# Altium PCB MODULIQ_ADC_10Vpp.PcbDoc (part 1 of 2)
Units mm, origin at the board's own origin, x right, y up, seen from the top; angles counter-clockwise.
Board outline 24 x 76.5 mm, 4 copper layers (L1, P2, L3, L4), stack 1.512 mm thick; 81 components, 92 nets, 302 pads, 168 vias.
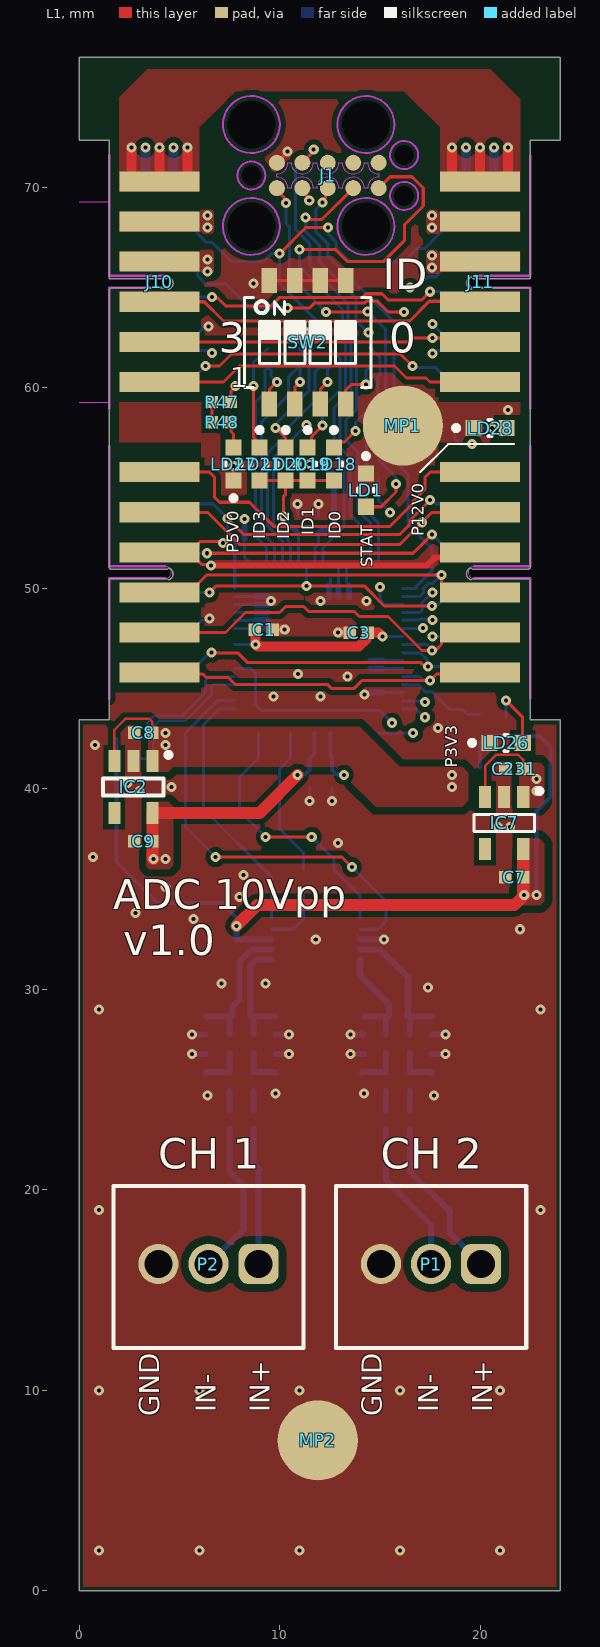
[diagram p0: L1 view]
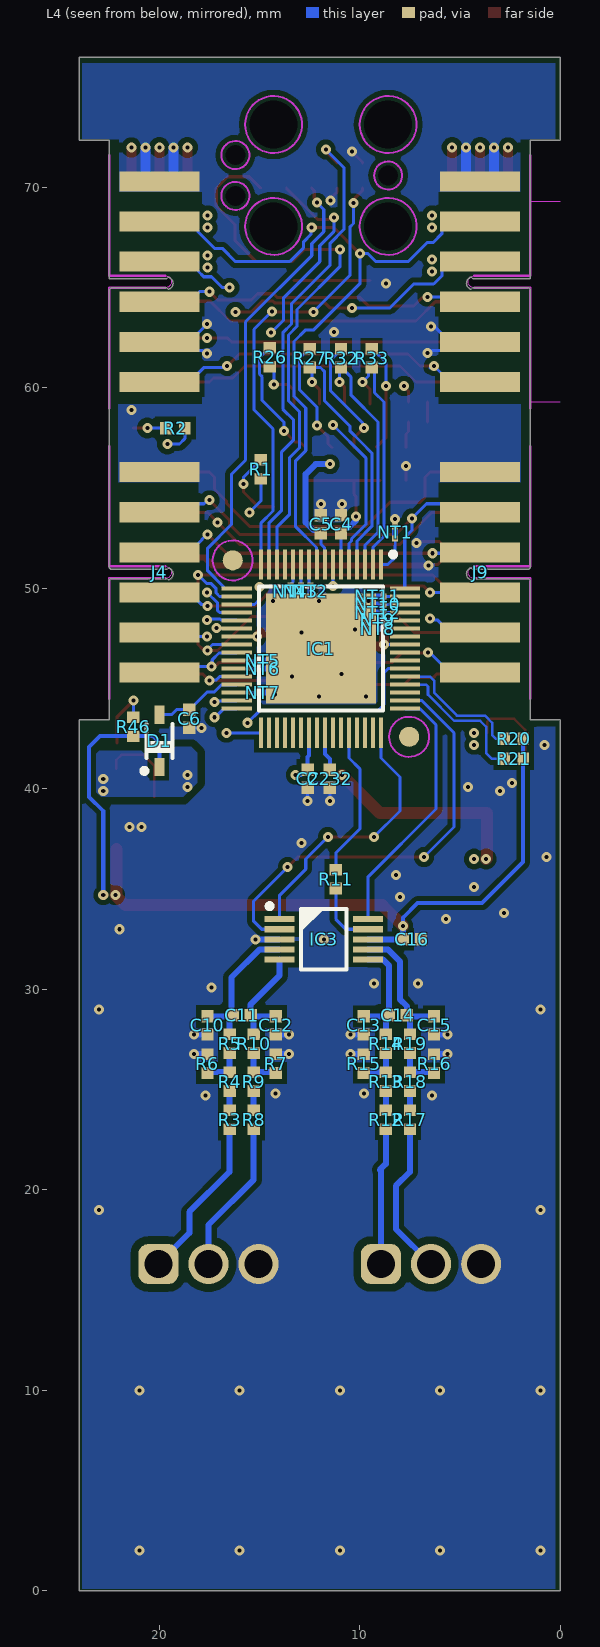
[diagram p1: L4 view, seen from below]
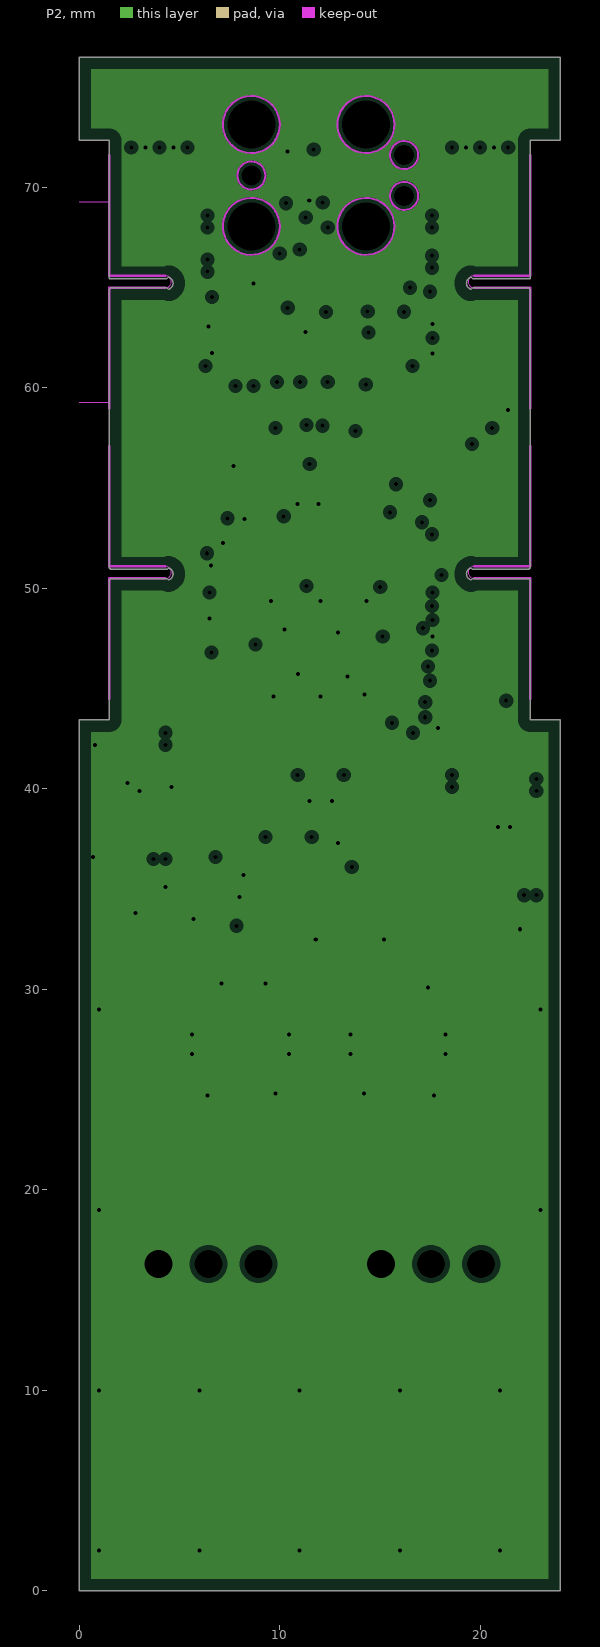
[diagram p2: P2, clearances drawn from the general rule]
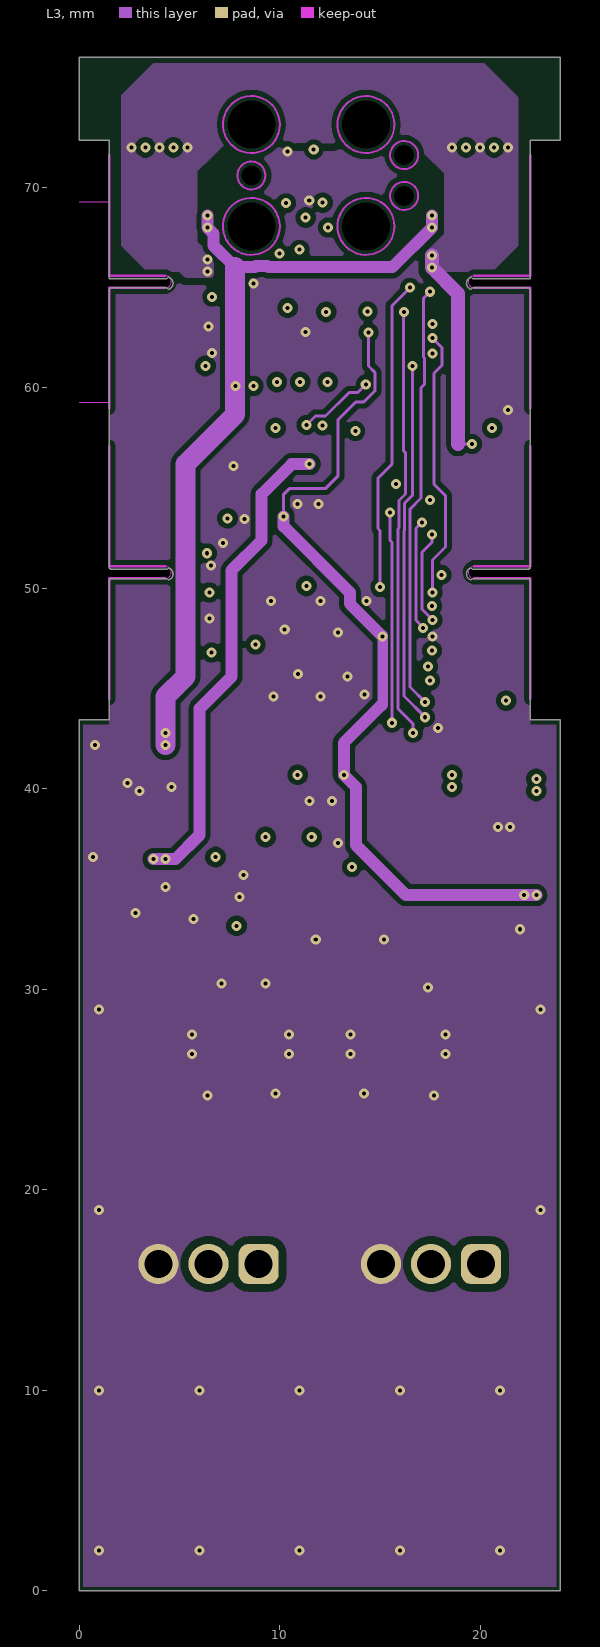
[diagram p3: L3]
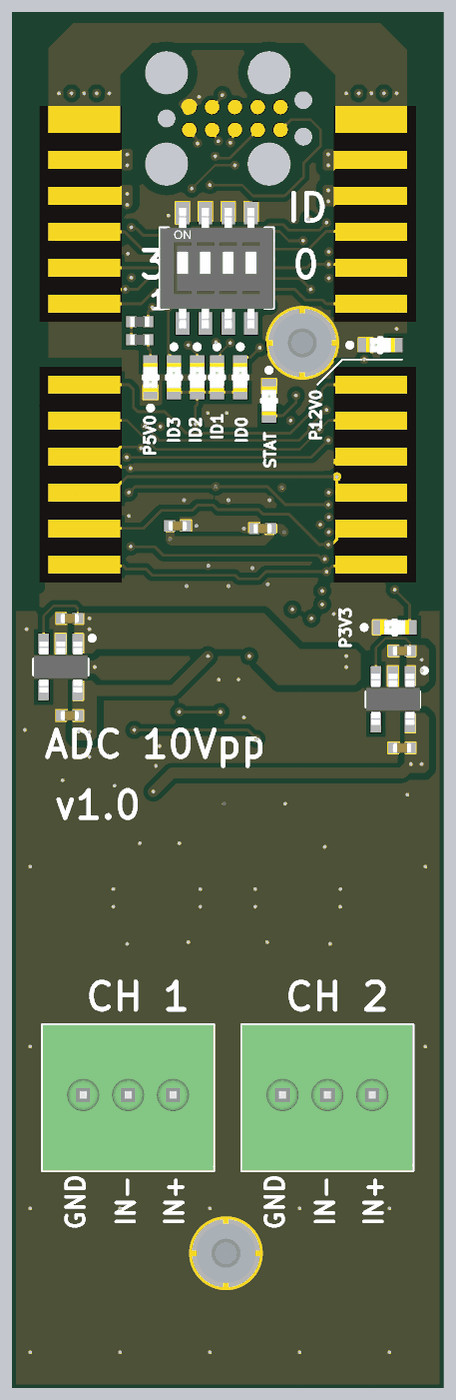
[diagram p4: 3D render of the assembled board from above, using the file's embedded part models]
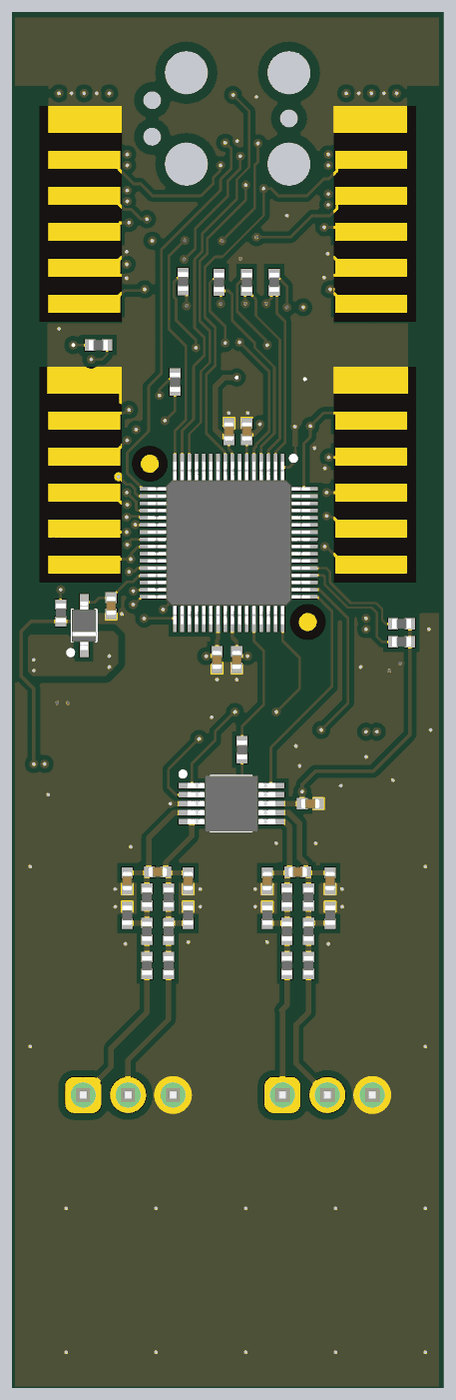
[diagram p5: 3D render of the assembled board from below, using the file's embedded part models]

## Layer stack, top to bottom
TopSolder: solder mask 0.025, Solder Resist, Dk 3.7
L1: signal copper 0.035
Dielectric1: core 0.138, FR-4, Dk 4.3
P2: plane copper 0.018, net GND
Dielectric3: core 1.13, FR-4, Dk 4.6
L3: signal copper 0.018
Dielectric5: core 0.138, FR-4, Dk 4.3
L4: signal copper 0.035
BottomSolder: solder mask 0.025, Solder Resist, Dk 3.7

## Board outline
0,0 0,43.44 1.5,43.44 1.5,50.413 1.577,50.49 4.377,50.49 4.452,50.428 ccw(c4.377,50.723) 4.681,50.723 ccw(c4.377,50.723) 4.452,51.019 4.377,50.957 1.577,50.957 1.5,51.033 1.5,57.023 1.5,64.913 1.577,64.99 4.377,64.99 4.452,64.928 ccw(c4.377,65.223) 4.681,65.223 ccw(c4.377,65.223) 4.452,65.519 4.377,65.457 1.5,65.457 1.5,72.347 0,72.347 0,76.5 24,76.5 24,72.347 22.5,72.347 22.5,65.457 19.623,65.457 19.548,65.519 ccw(c19.623,65.223) 19.319,65.223 ccw(c19.623,65.223) 19.548,64.928 19.623,64.99 22.423,64.99 22.5,64.913 22.5,57.023 22.5,51.033 22.423,50.957 19.623,50.957 19.548,51.019 ccw(c19.623,50.723) 19.319,50.723 ccw(c19.623,50.723) 19.548,50.428 19.623,50.49 22.423,50.49 22.5,50.413 22.5,43.44 24,43.44 24,0

## Design rules (kind name [scope] priority, off if disabled: settings)
Clearance Clearance_DIFF [(InDifferentialPairClass('All Differential Pairs'))] p1: gap=0.127 ignorepadtopadclearanceinfootprint=FALSE except(0: Arc-Hole Track-Hole SMDPad-Hole THPad-Hole Via-Hole Fill-Hole Poly-Hole Region-Hole Text-Hole; 0.254: Arc-Poly Track-Poly SMDPad-Poly THPad-Poly Via-Poly Fill-Poly Poly-Poly Poly-Region Poly-Text)
Clearance [All] p2: gap=0.127 ignorepadtopadclearanceinfootprint=FALSE except(0: Arc-Hole Track-Hole SMDPad-Hole THPad-Hole Via-Hole Fill-Hole Poly-Hole Region-Hole Text-Hole; 0.254: Arc-Poly Track-Poly SMDPad-Poly Via-Poly; 0.381: THPad-Poly Fill-Poly Poly-Poly)
ComponentClearance [All] p1 off: gap=0.254 collisioncheckmode=3 verticalgap=0.254 showdistances=FALSE
DiffPairsRouting [All] p1: maxlimit=0.254 minlimit=0.127 mostfreqgap=0.127 toplayer_minwidth=0.127 toplayer_maxwidth=0.381 toplayer_prefwidth=0.254 midlayer1_minwidth=0.127 midlayer1_maxwidth=0.381 midlayer1_prefwidth=0.254 bottomlayer_minwidth=0.127 bottomlayer_maxwidth=0.381 bottomlayer_prefwidth=0.254 maxuncoupledlength=12.7
FabricationTestPointUsage TestPointUsage [All] p1: valid=0 allowmultiple=FALSE
FabricationTestpoint Testpoint [All] p1: side=3 testpointundercomponent=TRUE minsize=1.016 maxsize=2.54 preferedsize=1.524 minholesize=0.508 maxholesize=1.016 preferedholesize=0.813 testpointgrid=0.025 allowsidetop=TRUE allowsidebottom=TRUE usegrid=TRUE gridtolerance=0
Height [All] p1 off: minheight=0 maxheight=25.4 prefheight=12.7
HoleSize [All] p1: absolutevalues=TRUE maxlimit=3.81 minlimit=0.025 maxpercent=80.000 minpercent=20.000
HoleToHoleClearance [All] p1: gap=0.025 allowstackedmicrovias=TRUE
MinimumSolderMaskSliver [All] p1: minsoldermaskwidth=0
PlaneClearance [All] p1: clearance=0.254
PlaneConnect [All] p1: planeconnectstyle=Direct reliefexpansion=0.508 reliefentries=4 reliefconductorwidth=0.254 reliefairgap=0.254
PolygonConnect [All] p1: connectstyle=Direct reliefconductorwidth=0.254 reliefentries=4 polygonreliefangle="45 Angle" airgapwidth=0.254
PolygonConnect PolygonConnect_pad [(InPadClass('All Pads'))] p2: connectstyle=Relief reliefconductorwidth=0.254 reliefentries=4 polygonreliefangle="90 Angle" airgapwidth=0.254
RoutingVias [All] p1: holewidth=0.2 width=0.5 viastyle="Through Hole" minholewidth=0.2 minwidth=0.5 maxholewidth=1 maxwidth=2
SilkToSilkClearance [All] p1: silktosilkclearance=0
SilkToSolderMaskClearance SilkscreenOverComponentPads [IsPad] p1: minsilkscreentomaskgap=0 clearancetoexposedcopper=TRUE
SolderMaskExpansion [All] p1: expansion=0.051 istentingtop=FALSE
SupplyNets "Schematic Supply Nets_2" [InNet('P1V8')] p1: voltage=0.000
SupplyNets "Schematic Supply Nets_4" [InNet('P5V0')] p2: voltage=0.000
SupplyNets "Schematic Supply Nets_3" [InNet('GND')] p3: voltage=0.000
SupplyNets "Schematic Supply Nets_1" [InNet('P12V0')] p4: voltage=0.000
SupplyNets "Schematic Supply Nets" [InNet('P3V3')] p5: voltage=0.000
Width [All] p1: maxlimit=1.27 minlimit=0.127 preferedwidth=0.127
18 further rules are at their usual default settings.

## Classes and differential pairs
component class MODULIQ_ADC_10Vpp: C10 C11 C12 C13 C14 C15 C16 IC3 P1 P2 R3 R4 R5 R6 R7 R8 R9 R10 R11 R12 R13 R14 R15 R16 R17 R18 R19 R20 R21
component class U_SPI_IFC: C1 C2 C3 C4 C5 C6 C7 C8 C9 C231 C232 D1 IC1 IC2 IC7 J1 J4 J9 J10 J11 LD1 LD18 LD19 LD20 LD21 LD26 LD27 LD28 MP1 MP2 NT1 NT2 NT3 NT4 NT5 NT6 NT7 NT8 NT9 NT10 NT11 NT12 R1 R2 R26 R27 R32 R33 R46 R47 R48 SW2

## Components (designator, comment, footprint, x,y, rotation, side; value= is the part's Value field where it differs from the comment)
C1 "1uF" CAPC1005X55N 9.212,47.947 r180 top
C2 "1uF" CAPC1005X55N 12.6,40.5 r90 bottom
C3 "1uF" CAPC1005X55N 13.943,47.8 r0 top
C4 "1uF" CAPC1005X55N 10.94,53.2 r270 bottom
C5 "1uF" CAPC1005X55N 11.94,53.2 r270 bottom
C6 "1uF" CAPC1005X55N 18.5,43.5 r90 bottom
C7 "1uF" CAPC1005X55N 21.7,35.6 r0 top
C8 "1uF" CAPC1005X55N 3.2,42.8 r0 top
C9 "1uF" CAPC1005X55N 3.2,37.4 r0 top
C10 "4.7nF" CAPC1005X55N 17.6,28.2 r90 bottom
C11 "47nF" CAPC1005X55N 15.9,28.7 r0 bottom
C12 "4.7nF" CAPC1005X55N 14.2,28.2 r270 bottom
C13 "4.7nF" CAPC1005X55N 9.8,28.2 r90 bottom
C14 "47nF" CAPC1005X55N 8.1,28.7 r0 bottom
C15 "4.7nF" CAPC1005X55N 6.3,28.2 r270 bottom
C16 "100nF" CAPC1005X55N 7.4,32.5 r0 bottom
C231 "1uF" CAPC1005X55N 21.7,41 r0 top
C232 "1uF" CAPC1005X55N 11.5,40.5 r90 bottom
D1 "BAT165" SOD2512X110N 20,42.4 r90 bottom
IC1 "5M160ZE64A5N" QFP40P900X900X120-65N-S550 11.94,47 r270 bottom locked
IC2 "AP2112K-1.8TRG1" SOT95P285X140-5N 2.7,40.1 r270 top
IC3 "ADS1118IDGST" SOP50P490X110-10N 11.8,32.5 r180 bottom
IC7 "AP2112K-3.3TRG1" SOT95P285X140-5N 21.2,38.3 r270 top
J1 "TC2050-IDC" TC2050-IDC 12.4,70.6 r0 top
J4 "" EDGE12T1B6_P200W1000L0F100X400 20,50.8 r270 bottom
J9 "" EDGE12T5B10_P200W1000L0F100X400 4,50.8 r90 bottom
J10 "" EDGE12T1B6_P200W1000L0F100X400 4,65.3 r270 top
J11 "" EDGE12T5B10_P200W1000L0F100X400 20,65.3 r90 top
LD1 "Green" LED_KINGBRIGHT_KP-1608CGCK 14.3,54.9 r270 top
LD18 "Green" LED_KINGBRIGHT_KP-1608CGCK 12.7,56.2 r270 top
LD19 "Green" LED_KINGBRIGHT_KP-1608CGCK 11.4,56.2 r270 top
LD20 "Green" LED_KINGBRIGHT_KP-1608CGCK 10.3,56.2 r270 top
LD21 "Green" LED_KINGBRIGHT_KP-1608CGCK 9,56.2 r270 top
LD26 "Green" LED_KINGBRIGHT_KP-1608CGCK 21.3,42.3 r0 top
LD27 "Green" LED_KINGBRIGHT_KP-1608CGCK 7.7,56.2 r90 top
LD28 "Green" LED_KINGBRIGHT_KP-1608CGCK 20.5,58 r0 top
MP1 "M1.6 x 3mm" 97730306330 16.15,58.125 r0 top
MP2 "M1.6 x 3mm" 97730306330 11.9,7.5 r0 top
NT1 "Net Tie" "Net Tie 3" 8.24,52.5 r90 bottom net-tie
NT2 "Net Tie" "Net Tie 3" 12.453,50.148 r270 bottom net-tie
NT3 "Net Tie" "Net Tie 3" 12.94,50.148 r270 bottom net-tie
NT4 "Net Tie" "Net Tie 3" 13.463,50.148 r270 bottom net-tie
NT5 "Net Tie" "Net Tie 3" 15.14,46.4 r180 bottom net-tie
NT6 "Net Tie" "Net Tie 3" 15.14,46 r180 bottom net-tie
NT7 "Net Tie" "Net Tie 3" 15.14,44.8 r180 bottom net-tie
NT8 "Net Tie" "Net Tie 3" 8.814,48 r0 bottom net-tie
NT9 "Net Tie" "Net Tie 3" 8.814,48.433 r0 bottom net-tie
NT10 "Net Tie" "Net Tie 3" 8.814,49.2 r0 bottom net-tie
NT11 "Net Tie" "Net Tie 3" 8.814,49.6 r0 bottom net-tie
NT12 "Net Tie" "Net Tie 3" 8.814,48.8 r0 bottom net-tie
P1 "691382000003" 691382000003 17.55,16.15 r180 top
P2 "691382000003" 691382000003 6.45,16.15 r180 top
R1 "3k3" RESC1005X40N 14.94,55.941 r270 bottom
R2 "10k" RESC1005X40N 19.2,58 r0 bottom
R3 "10k" RESC1005X40N 16.5,23.5 r270 bottom
R4 "10k" RESC1005X40N 16.5,25.4 r270 bottom
R5 "499" RESC1005X40N 16.5,27.3 r90 bottom
R6 "10k" RESC1005X40N 17.6,26.3 r270 bottom
R7 "10k" RESC1005X40N 14.2,26.3 r90 bottom
R8 "10k" RESC1005X40N 15.3,23.5 r270 bottom
R9 "10k" RESC1005X40N 15.3,25.4 r270 bottom
R10 "499" RESC1005X40N 15.3,27.3 r90 bottom
R11 "22" RESC1005X40N 11.2,35.5 r90 bottom
R12 "10k" RESC1005X40N 8.7,23.5 r270 bottom
R13 "10k" RESC1005X40N 8.7,25.4 r270 bottom
R14 "499" RESC1005X40N 8.7,27.3 r90 bottom
R15 "10k" RESC1005X40N 9.8,26.3 r270 bottom
R16 "10k" RESC1005X40N 6.3,26.3 r90 bottom
R17 "10k" RESC1005X40N 7.5,23.5 r270 bottom
R18 "10k" RESC1005X40N 7.5,25.4 r270 bottom
R19 "499" RESC1005X40N 7.5,27.3 r90 bottom
R20 "3k3" RESC1005X40N 2.32,42.5 r0 bottom
R21 "3k3" RESC1005X40N 2.32,41.5 r0 bottom
R26 "3k3" RESC1005X40N 14.491,61.532 r270 bottom
R27 "3k3" RESC1005X40N 12.493,61.49 r270 bottom
R32 "3k3" RESC1005X40N 10.94,61.49 r270 bottom
R33 "3k3" RESC1005X40N 9.414,61.49 r270 bottom
R46 "3k3" RESC1005X40N 21.3,43.1 r270 bottom
R47 "3k3" RESC1005X40N 7.1,59.3 r0 top
R48 "3k3" RESC1005X40N 7.1,58.3 r180 top
SW2 "Switch" SW_OMRON_A6H-4102 11.39,62.275 r90 top

## Footprints (in the part's own frame and the unit in brackets; to place one, negate y for a bottom-side part, rotate by r counter-clockwise, add the part's x,y. Pads: shape width x height; smd on the part's side, far side on the other; paste and mask are expansions set on the pad)
97730306330 [mm] "SMT Steel Spacer with internal Thread M1.6 Bottom closed, height 3mm"
  round 4 smd paste-2539.97: 1(0,0)
  body extent -1.65,-1.65 1.65,1.65, height 3
691382000003 [mm] "Vertical PCB Header, pitch 2.5mm, 03p"
  rrect50% 2x2 hole 1.4: 1(-2.5,-0.15)
  round 2 hole 1.4: 2(0,-0.15) 3(2.5,-0.15)
  silkscreen extent -4.75,-4.05 4.75,4.05, body extent -4.75,-4.05 4.75,4.05, height 10.14
CAPC1005X55N [mm] "Capacitor, Non-Polarized, Chip; 1.00mm L X 0.50mm W X 0.70mm H, IPC Medium Density"
  rect 0.62x0.62 smd: 1(-0.45,0) 2(0.45,0)
  body extent -0.52,-0.27 0.53,0.28, height 0.55
EDGE12T1B6_P200W1000L0F100X400 [mm] "12 contacts Board Edge Connector, First Left Top Pad 1, First Left Bottom Pad 2, Pitch 2mm, Length 0mm, Width 12.5mm, Finger Lenght 4mm, Finger Width 1mm"
  rect 1x4 smd paste-0.5: 1(-5,0) 2(-3,0) 3(-1,0) 4(1,0) 5(3,0) 6(5,0)
  rect 1x4 smd far side paste-0.5: 7(-5,0) 8(-3,0) 9(-1,0) 10(1,0) 11(3,0) 12(5,0)
  KeepOutLayer lines w0.05: 0.3,0.3 ccw(c0,0.3) -0.3,0.3
  KeepOutLayer lines w0.13: 0.3,0.3 0.3,-2.5 6.3,-2.5 ; -0.3,0.3 -0.3,-2.5 -6.3,-2.5
EDGE12T5B10_P200W1000L0F100X400 [mm] "12 contacts Board Edge Connector, First Left Top Pad 5, First Left Bottom Pad 10, Pitch 2mm, Length 0mm, Width 12.5mm, Finger Lenght 4mm, Finger Width 1mm"
  rect 1x4 smd paste-0.5: 1(5,0) 2(3,0) 3(1,0) 4(-1,0) 5(-3,0) 6(-5,0)
  rect 1x4 smd far side paste-0.5: 7(5,0) 8(3,0) 9(1,0) 10(-1,0) 11(-3,0) 12(-5,0)
  KeepOutLayer lines w0.05: -0.3,0.3 cw(c0,0.3) 0.3,0.3
  KeepOutLayer lines w0.13: -6.3,-2.5 -0.3,-2.5 -0.3,0.3 ; 6.3,-2.5 0.3,-2.5 0.3,0.3
LED_KINGBRIGHT_KP-1608CGCK [mm] "SMT Green LED, Case 0603, Body L 1.60mm x W 0.80mm x H 1.10mm"
  rect 0.8x0.8 smd: 1(-0.825,0) 2(0.825,0)
  silkscreen extent -1.82,-0.4 0.08,0.4, body extent -0.8,-0.4 0.8,0.4, height 1.1
"Net Tie 3" [mm] "SMD Net Tie"
  rect 0.3x0.3 smd paste-2539.97 mask-0.064: 1(0,0) 2(0.6,0)
  L1 lines w0.3: 0,0 0.6,0
QFP40P900X900X120-65N-S550 [mm] "QFP, 0.40mm Pitch, Square; 64 Pin, 7.00mm L X 7.00mm W X 1.20mm H Body (w/Thermal Tab), IPC Medium Density"
  rect 1.5x0.2 smd: 1(-4.2,3) 2(-4.2,2.6) 3(-4.2,2.2) 4(-4.2,1.8) 5(-4.2,1.4) 6(-4.2,1) 7(-4.2,0.6) 8(-4.2,0.2) 9(-4.2,-0.2) 10(-4.2,-0.6) 11(-4.2,-1) 12(-4.2,-1.4) 13(-4.2,-1.8) 14(-4.2,-2.2) 15(-4.2,-2.6) 16(-4.2,-3) 33(4.2,-3) 34(4.2,-2.6) 35(4.2,-2.2) 36(4.2,-1.8) 37(4.2,-1.4) 38(4.2,-1) 39(4.2,-0.6) 40(4.2,-0.2) 41(4.2,0.2) 42(4.2,0.6) 43(4.2,1) 44(4.2,1.4) 45(4.2,1.8) 46(4.2,2.2) 47(4.2,2.6) 48(4.2,3)
  rect 0.2x1.5 smd: 17(-3,-4.2) 18(-2.6,-4.2) 19(-2.2,-4.2) 20(-1.8,-4.2) 21(-1.4,-4.2) 22(-1,-4.2) 23(-0.6,-4.2) 24(-0.2,-4.2) 25(0.2,-4.2) 26(0.6,-4.2) 27(1,-4.2) 28(1.4,-4.2) 29(1.8,-4.2) 30(2.2,-4.2) 31(2.6,-4.2) 32(3,-4.2) 49(3,4.2) 50(2.6,4.2) 51(2.2,4.2) 52(1.8,4.2) 53(1.4,4.2) 54(1,4.2) 55(0.6,4.2) 56(0.2,4.2) 57(-0.2,4.2) 58(-0.6,4.2) 59(-1,4.2) 60(-1.4,4.2) 61(-1.8,4.2) 62(-2.2,4.2) 63(-2.6,4.2) 64(-3,4.2)
  rect 5.5x5.5 smd: 65(0,0)
  round 1 smd paste-0.51 mask+0.5: FTG1(-4.4,-4.4) FTG2(4.4,4.4)
  L1 keep-out circle w0.1: c4.4,4.4 r1
  L1 keep-out circle w0.1: c-4.4,-4.4 r1
  silkscreen extent -4.82,-3.1 3.1,3.72, body extent -4.52,-4.52 4.52,4.52, height 1.2
RESC1005X40N [mm] "Chip Resistor, EIA 0402, Metric 1005, Body 1.0x0.5mm, IPC Medium Density"
  rect 0.58x0.62 smd: 1(-0.47,0) 2(0.47,0)
  body extent -0.52,-0.27 0.53,0.28, height 0.4
SOD2512X110N [mm] "Small Outline Diode (SOD-323), 1.70mm W X 1.25mm L X 1.10mm H body,  IPC Medium Density"
  rect 0.9x0.5 smd: 1(-1.3,0) 2(1.3,0)
  silkscreen extent -1.62,-0.65 0.85,0.88, body extent -1.35,-0.67 1.35,0.68, height 1.1
SOP50P490X110-10N [mm] "MSOP, 10-Leads, Body 3.1x3.1mm (max), Pitch 0.50mm, IPC Medium Density"
  rect 1.5x0.3 smd: 1(-2.2,1) 2(-2.2,0.5) 3(-2.2,0) 4(-2.2,-0.5) 5(-2.2,-1) 6(2.2,-1) 7(2.2,-0.5) 8(2.2,0) 9(2.2,0.5) 10(2.2,1)
  silkscreen extent -2.83,-1.5 1.12,1.77, body extent -2.45,-1.55 2.45,1.55, height 1.1
SOT95P285X140-5N [mm] "SOT23, 5-Leads, Body 3.00x2.85mm, Pitch 0.95mm, IPC Medium Density"
  rect 1.1x0.6 smd: 1(-1.3,0.95) 2(-1.3,0) 3(-1.3,-0.95) 4(1.3,-0.95) 5(1.3,0.95)
  silkscreen extent -1.72,-1.5 0.42,1.87, body extent -1.43,-1.5 1.43,1.5, height 1.4
SW_OMRON_A6H-4102 [mm] "Pitch 1.27mm, Body 6.31 x 4.5mm, 4 Ways SPST Surface-Mounting DIP Switch, OMRON A6H"
  rect 1.25x0.76 smd: 1(-3.075,1.905) 2(-3.075,0.635) 3(-3.075,-0.635) 4(-3.075,-1.905) 5(3.075,-1.905) 6(3.075,-0.635) 7(3.075,0.635) 8(3.075,1.905)
  silkscreen extent -2.25,-3.16 2.25,3.16, body extent -3.35,-3.15 3.35,3.16, height 1.55
TC2050-IDC [mm] "TAG-CONNECT IN-CIRCUIT Cable Legged"
  round 0.8 smd paste-0.4: 1(-2.54,-0.635) 2(-1.27,-0.635) 3(0,-0.635) 4(1.27,-0.635) 5(2.54,-0.635) 6(2.54,0.635) 7(1.27,0.635) 8(0,0.635) 9(-1.27,0.635) 10(-2.54,0.635)
  round 0.5 hole 2.4 unplated mask+0.95: Mech(-3.81,-2.54) Mech(-3.81,2.54) Mech(1.905,-2.54) Mech(1.905,2.54)
  round 0.5 hole 1 unplated mask+0.25: Mech(-3.81,0) Mech(3.81,-1.016) Mech(3.81,1.016)
  L1 keep-out region: -2.54,0.085 -2.33,0.127 -2.151,0.246 -2.032,0.425 -1.99,0.635 -1.99,0.635 -1.82,0.635 -1.778,0.425 -1.659,0.246 -1.48,0.127 -1.27,0.085 -1.27,0.085 -1.06,0.127 -0.881,0.246 -0.762,0.425 -0.72,0.635 -0.72,0.635 -0.55,0.635 -0.508,0.425 -0.389,0.246 -0.21,0.127 0,0.085 0,0.085 0.21,0.127 0.389,0.246 0.508,0.425 0.55,0.635 0.55,0.635 0.72,0.635 0.72,0.615 0.76,0.413 0.875,0.241 1.047,0.126 1.25,0.085 1.25,0.085 1.27,0.085 1.481,0.127 1.659,0.246 1.778,0.425 1.82,0.635 1.82,0.635 1.99,0.635 2.032,0.425 2.151,0.246 2.33,0.127 2.54,0.085 2.54,0.085 2.54,-0.085 2.33,-0.127 2.151,-0.246 2.032,-0.425 1.99,-0.635 1.99,-0.635 1.82,-0.635 1.778,-0.425 1.659,-0.246 1.48,-0.127 1.27,-0.085 1.27,-0.085 1.06,-0.127 0.881,-0.246 0.762,-0.425 0.72,-0.635 0.72,-0.635 0.55,-0.635 0.508,-0.425 0.389,-0.246 0.21,-0.127 0,-0.085 0,-0.085 -0.21,-0.127 -0.389,-0.246 -0.508,-0.425 -0.55,-0.635 -0.55,-0.635 -0.72,-0.635 -0.72,-0.615 -0.76,-0.413 -0.875,-0.241 -1.047,-0.126 -1.25,-0.085 -1.25,-0.085 -1.27,-0.085 -1.481,-0.127 -1.659,-0.246 -1.778,-0.425 -1.82,-0.635 -1.82,-0.635 -1.99,-0.635 -2.032,-0.425 -2.151,-0.246 -2.33,-0.127 -2.54,-0.085 -2.54,-0.085

## Part data
C1 C2 C3 C4 C5 C6 C7 C8 C9 C231 C232: library part CC0402_1UF_16V_10%_X5R, "Non-polarised capacitor", Case=0402, Manufacturer=GENERIC, Manufacturer1 ComponentHeight=0.55mm, Manufacturer1 Example=TDK, Manufacturer1 Part Number=C1005X5R1C105KT, Tolerance=±10%, Voltage=16V, Author="CERN DEM JLC", Component Type=Standard, CreateDate=25.10.2012, HelpURL=\\cern.ch\dfs\Applications\Altium\Datasheets\CC0402_X5R_TDK_C.pdf, LatestRevisionDate=25.10.2012, Manufacturer Part Number=CC0402_1UF_16V_10%_X5R, Mounted=Yes, Part Description="SMD Multilayer Chip Ceramic Capacitor", Part Number=CC0402_1UF_16V_10%_X5R, Pin Count=2, Sense=No, SMD=Yes, Socket=No, Status=Preferred, TC=X5R
C10 C12 C13 C15: library part CC0402_4.7NF_16V_10%_X7R, "Non-polarised capacitor", Case=0402, Manufacturer=GENERIC, Manufacturer1 ComponentHeight=0.55mm, Manufacturer1 Example=PHYCOMP, Manufacturer1 Part Number=223878715632, Tolerance=±10%, Voltage=16V, Author="CERN DEM JLC", Component Type=Standard, CreateDate=12/3/2007, HelpURL=\\cern.ch\dfs\Applications\Altium\Datasheets\CC0402_X7R_PHYCOMP.pdf, LatestRevisionDate=12/3/2007, Manufacturer Part Number=CC0402_4.7NF_16V_10%_X7R, Mounted=Yes, Part Description="SMD Multilayer Chip Ceramic Capacitor", Part Number=CC0402_4.7NF_16V_10%_X7R, Pin Count=2, Sense=No, SMD=Yes, Socket=No, Status="Not Recommended", TC=X7R
C11 C14: library part CC0402_47NF_25V_10%_X7R, "Non-polarised capacitor", Case=0402, Manufacturer=GENERIC, Manufacturer1 ComponentHeight=0.55mm, Manufacturer1 Example=TDK, Manufacturer1 Part Number=C1005X7R1E473K050, Tolerance=±10%, Voltage=25V, Author="CERN DEM JLC", Component Type=Standard, CreateDate=10/25/2012, HelpURL=\\cern.ch\dfs\Applications\Altium\Datasheets\CC0402_X7R_TDK_C.pdf, LatestRevisionDate=10/25/2012, Manufacturer Part Number=CC0402_47NF_25V_10%_X7R, Mounted=Yes, Part Description="SMD Multilayer Chip Ceramic Capacitor", Part Number=CC0402_47NF_25V_10%_X7R, Pin Count=2, Sense=No, SMD=Yes, Socket=No, Status=Preferred, TC=X7R
C16: library part CC0402_100NF_16V_10%_X7R, "Non-polarised capacitor", Case=0402, Manufacturer=GENERIC, Manufacturer1 ComponentHeight=0.55mm, Manufacturer1 Example=MURATA, Manufacturer1 Part Number=GRM155R71C104KA88D, Tolerance=±10%, Voltage=16V, Author="CERN DEM JLC", Component Type=Standard, CreateDate=12/5/2013, HelpURL=\\cern.ch\dfs\Applications\Altium\Datasheets\CC0402_X7R_MURATA_GRM.pdf, LatestRevisionDate=12/3/2007, Manufacturer Part Number=CC0402_100NF_16V_10%_X7R, Mounted=Yes, Part Description="SMD Multilayer Chip Ceramic Capacitor", Part Number=CC0402_100NF_16V_10%_X7R, Pin Count=2, Sense=No, SMD=Yes, Socket=No, Status="Not Recommended", TC=X7R
D1: "Schottky Diode", Case=SOD-323, Manufacturer=INFINEON, Power=750mA, Voltage=40V, Author="CERN DEM JLC", Bonding=No, Component Type=Standard, ComponentHeight=1.1mm, CreateDate=12.11.2014, Device=BAT165, HelpURL=\\cern.ch\dfs\Applications\Altium\Datasheets\BAT165.pdf, LatestRevisionDate=12.11.2014, Manufacturer Part Number=BAT165, Mounted=Yes, PackageDescription="Small Outline Diode (SOD-323), 1.70mm W X 1.25mm L X 1.10mm H body,  IPC Medium Density", Part Description="Medium Power AF Schottky Diode", Part Number=BAT165, Pin Count=2, PressFit=No, Sense=No, SMD=Yes, Socket=No
IC1: "MAX V 1.8V CPLD, 54 IOs, 160 Logic Elements, 64-Pin EQFP, Automotive Temperature, Speed Grade 5, Pb-Free", Case=QFP64, Manufacturer=ALTERA, Author="CERN DEM JLC", Bonding=No, Component Type=Standard, ComponentHeight=1.2mm, ComponentLink1Description="Package Drawing", ComponentLink1URL=\\cern.ch\dfs\Applications\Altium\Datasheets\5M160ZE64A5N_Package.pdf, ComponentLink2Description=Pinout, ComponentLink2URL=\\cern.ch\dfs\Applications\Altium\Datasheets\5M160ZE64A5N_Pinout.pdf, CreateDate=07.01.2015, Device=5M160ZE64A5N, HelpURL=\\cern.ch\dfs\Applications\Altium\Datasheets\5M160ZE64A5N.pdf, LatestRevisionDate=27.10.2022, Manufacturer Part Number=5M160ZE64A5N, Mounted=Yes, PackageDescription="QFP, 0.40mm Pitch, Square; 64 pin, 7.00mm L X 7.00mm W X 1.20mm H body (w/Thermal Tab 5.50 X 5.50mm), IPC Medium Density", Part Description="MAX V 1.8V CPLD, 54 IOs, 160 Logic Elements, 64-Pin EQFP, Automotive Temperature, Speed Grade 5, Pb-Free", Part Number=5M160ZE64A5N, Pin Count=65, PressFit=No, Sense=No, SMD=Yes, Socket=No, Status="Not Recommended"
IC2: "600mA CMOS Low Dropout Linear Regulator with Enable", Case=SOT25, Manufacturer="DIODES INCORPORATED", Manufacturer Part Number=AP2112K-1.8, Author="CERN DEM JLC", Bonding=No, Component Type=Standard, ComponentHeight=1.4mm, CreateDate=13.06.2018, Device=AP2112K-1.8TRG1, HelpURL=\\cern.ch\dfs\Applications\Altium\Datasheets\AP2112K-1.8TRG1.pdf, LatestRevisionDate=27.06.2022, Mounted=Yes, PackageDescription="SOT23, 0.95mm Pitch; 5 Pin, 1.6mm W X 3.0mm L X 1.40mm H body, IPC Medium Density", Part Description="1.8V 600mA CMOS Low Dropout Linear Regulator with Enable", Part Number=AP2112K-1.8TRG1, Pin Count=5, PressFit=No, Sense=No, SMD=Yes, Socket=No
IC3: "Quad Channel Single ADC Delta-Sigma 860sps 16-bit Serial 10-Pin VSSOP T/R", Case/Package=VSSOP, Manufacturer="Texas Instruments", Max Operating Temperature=125°C, Max Power Dissipation=900uW, Max Supply Voltage=5.5V, Min Operating Temperature=-40°C, Min Supply Voltage=2V, Operating Supply Voltage=3.3V, Package Quantity=250, Supplier Part Number=595-ADS1118IDGST, Supply Current=150uA, Category="Analog to Digital Converters (ADCs)", ComponentLink1Description=https://datasheet.ciiva.com/7989/1634024-7989312.pdf?src-supplier=Element14, ComponentLink1URL=https://datasheet.ciiva.com/7989/1634024-7989312.pdf?src-supplier=Element14, ComponentLink2Description=https://datasheet.ciiva.com/41461/001186694-da-01-en-ic-adc-16bit-sp-ads1118idgst-msop-10-tid-41461012.pdf?src-supplier=Conrad, ComponentLink2URL=https://datasheet.ciiva.com/41461/001186694-da-01-en-ic-adc-16bit-sp-ads1118idgst-msop-10-tid-41461012.pdf?src-supplier=Conrad, ComponentLink3Description=https://datasheet.ciiva.com/1261/ads1118-1261457.pdf?src-supplier=Digikey, ComponentLink3URL=https://datasheet.ciiva.com/1261/ads1118-1261457.pdf?src-supplier=Digikey, ComponentLink4Description=https://datasheet.ciiva.com/1261/ads1118-1261458.pdf?src-supplier=Digikey, ComponentLink4URL=https://datasheet.ciiva.com/1261/ads1118-1261458.pdf?src-supplier=Digikey, ComponentLink5Description=https://datasheet.ciiva.com/1261/ads1118-1261459.pdf?src-supplier=Digikey, ComponentLink5URL=https://datasheet.ciiva.com/1261/ads1118-1261459.pdf?src-supplier=Digikey, ComponentLink6Description=https://datasheet.ciiva.com/14259/ads1118-14259989.pdf?src-supplier=Avnet, ComponentLink6URL=https://datasheet.ciiva.com/14259/ads1118-14259989.pdf?src-supplier=Avnet, ComponentLink7Description=https://datasheet.ciiva.com/46394/1793017-46394506.pdf?src-supplier=Element14, ComponentLink7URL=https://datasheet.ciiva.com/46394/1793017-46394506.pdf?src-supplier=Element14, ComponentLink8Description=https://datasheet.ciiva.com/46394/1793017-46394507.pdf?src-supplier=Element14, ComponentLink8URL=https://datasheet.ciiva.com/46394/1793017-46394507.pdf?src-supplier=Element14, Contact Plating=Gold, Conversion Rate=860S/s, Height=1.1mm, Integral Nonlinearity (INL)=1LSB, Interface=SPI, Lead Free="Lead Free", Length=3.1mm, Manufacturer Part Number=ADS1118IDGST, Max Supply Voltage (DC)=5.5V, Min Supply Voltage (DC)=2V, Number of A/D Converters=1, Number of Bits=16, Number of Channels=2, Number of Converters=1, Number of Elements=1, Number of Inputs=4, Packaging="Tape and Reel", Pins=10, Polarity=Bipolar, Power Dissipation=900uW, Pricing="1=6.29, 10=4.83, 25=4.47, 50=4.47, 100=4.07, 250=3.87, 500=3.69, 1000=3.59, 2500=3.5, 10000=3.59 (USD)", Reach SVHC Compliant=No, Resolution=16b, RoHS=Yes, RoHS Compliant=Yes, Sampling Rate=860S/s, Series=-, Stock=2422, Supplier=Mouser, Supply Type=Single, Thickness=1.02mm, Width=3.1mm
IC7: "600mA CMOS Low Dropout Linear Regulator with Enable", Case=SOT25, Manufacturer="DIODES INCORPORATED", Manufacturer Part Number=AP2112K-3.3, Author="CERN DEM MR", Bonding=No, Component Type=Standard, ComponentHeight=1.4mm, CreateDate=13.12.2017, Device=AP2112K-3.3TRG1, HelpURL=\\cern.ch\dfs\Applications\Altium\Datasheets\AP2112K-3.3TRG1.pdf, LatestRevisionDate=27.06.2022, Mounted=Yes, PackageDescription="SOT23, 0.95mm Pitch; 5 Pin, 1.6mm W X 3.0mm L X 1.40mm H body, IPC Medium Density", Part Description="3.3V 600mA CMOS Low Dropout Linear Regulator with Enable", Part Number=AP2112K-3.3TRG1, Pin Count=5, PressFit=No, Sense=No, SMD=Yes, Socket=No
J1: "TC2030-MCP and TC2050-IDC Pad Contact", Author="CERN DEM HF", Component Type="Standard (No BOM)", ComponentHeight=0mm, CreateDate=02.05.2024, Family=TC2050-IDC, HelpURL=\\cern.ch\dfs\Applications\Altium\Datasheets\TC2050-IDC.pdf, LatestRevisionDate=02.05.2024, Mounted=No, PackageDescription="10 X 31mil Diameter SMD Pad For TC2030-MCP Legged Connector", Part Description="10 X 31mil Diameter SMD Pad For TC2050-IDC Legged Connector", Part Number=TC2050-IDC, Pin Count=10, Sense=No, SMD=Yes, Socket=No, Status=None
J4 J10: library part "PCB Edge Connector 12 (2x6)", "PCB Edge Connector 12 (2x6)", Part Number=EDGE10T1B6_P200W1000L0F100X400, Author="CERN DEM MR", Component Type="Standard (No BOM)", ComponentHeight=0mm, CreateDate=14.02.2018, HelpURL=\\cern.ch\dfs\Applications\Altium\Datasheets\EDGE10T1B6_P200W1000L0F100X400.pdf, LatestRevisionDate=14.02.2018, Mounted=No, Part Description="10 Contacts Board Edge Connector, Pitch 2mm, Length 0mm, Width 10mm, Finger Lenght 4mm, Finger Width 1mm", Pin Count=12, PressFit=No, Sense=No, SMD=No, Socket=No, Status=None
J9 J11: library part "PCB Edge Connector 12 (2x6) R", "PCB Edge Connector 12 (2x6)", Part Number=EDGE12T5B10_P200W1000L0F100X400, Author=GK, Component Type="Standard (No BOM)", ComponentHeight=0mm, CreateDate=14.02.2018, HelpURL=\\cern.ch\dfs\Applications\Altium\Datasheets\EDGE10T5B10_P200W1000L0F100X400.pdf, LatestRevisionDate=14.02.2018, Mounted=No, Part Description="12 Contacts Board Edge Connector, Pitch 2mm, Length 0mm, Width 10mm, Finger Lenght 4mm, Finger Width 1mm", Pin Count=12, PressFit=No, Sense=No, SMD=No, Socket=No, Status=None
LD1 LD18 LD19 LD20 LD21 LD26 LD27 LD28: library part LED_KINGBRIGHT_KP-1608CGCK, "LED Green 1C 2A", Case=0603, Manufacturer=KINGBRIGHT, Manufacturer Part Number=KP-1608CGCK, Author="CERN DEM HF", Bonding=No, Color=Green, Component Type=Standard, ComponentHeight=1.1mm, CreateDate=01.10.2021, HelpURL=\\cern.ch\dfs\Applications\Altium\Datasheets\LED_KINGBRIGHT_KP-1608CGCK.pdf, LatestRevisionDate=01.10.2021, Mounted=Yes, PackageDescription="SMT Green LED, Case 0603, Body L 1.60mm x W 0.80mm x H 1.10mm", Part Description="1.6x0.8mm SMD Chip Green LED Lamp", Part Number=LED_KINGBRIGHT_KP-1608CGCK, Pin Count=2, PressFit=No, Sense=No, SMD=Yes, Socket=No
MP1 MP2: library part 97730306330R, "WA-SMSI SMT Steel Spacer with internal Thread Bottom closed, OD 3.3mm, M1.6 x 3mm", Manufacturer="Wurth Elektronik", Operating Temperature Max=150°C, Operating Temperature Min=-55°C, Category="SMT Spacers", ComponentLink1Description="Website Link", ComponentLink1URL=https://www.we-online.com/redexpert/article/97730306330R?ad, ComponentLink2Description="Datasheet Link", ComponentLink2URL=https://www.we-online.com/redexpert/spec/97730306330R?ad, Height=3mm, Inside Thread Length=1.8mm, Manufacturer Part Number=97730306330R, Match Code=WA-SMSI, Material=Steel, Mount="Surface Mount", Outside Diameter=3.3mm, Packaging="Tape and Reel", Surface=Tin, Thread Size=M1.6
NT1 NT2 NT3 NT4 NT5 NT6 NT7 NT8 NT9 NT10 NT11 NT12: library part "Net Tie 3", Author="CERN DEM HF", Component Type="Net Tie", ComponentHeight=0mm, CreateDate=23.09.2024, Family="Net Tie", HelpURL=Undefined, LatestRevisionDate=23.09.2024, Mounted=No, PackageDescription="SMD Net Tie", Part Description="Net Tie (2 Nets)", Part Number="Net Tie 3", Pin Count=2, Sense=No, SMD=No, Socket=No, Status=None
P1 P2: "WR-TBL Series 382 Vertical PCB Header, THT, pitch 2.5mm, 3p", Manufacturer="Wurth Elektronik", Operating Temperature Max=105°C, Operating Temperature Min=-40°C, Rated Current=4A, Working Voltage=300V, Application=Pluggable, Category="Terminal Blocks", ComponentLink1Description="Website Link", ComponentLink1URL=https://www.we-online.com/redexpert/article/691382000003?ad, ComponentLink2Description="Datasheet Link", ComponentLink2URL=https://www.we-online.com/redexpert/spec/691382000003?ad, Manufacturer Part Number=691382000003, Match Code=WR-TBL, Modularity=No, Mount="Through Hole", Number of Pins=3, Number of Rows=1, Orientation=Vertical, Packaging=Box, Pitch=2.5mm
R1 R20 R21 R26 R27 R32 R33 R46 R47 R48: library part R0402_3K3_1%_0.0625W_100PPM, "Resistor - 1%", Case=0402, Manufacturer=GENERIC, Manufacturer1 ComponentHeight=0.4mm, Manufacturer1 Example="YAGEO PHYCOMP", Manufacturer1 Part Number=232270673302L, Power=0.0625W, Tolerance=±1%, Author="CERN DEM JLC", Component Type=Standard, CreateDate=03.12.2007, HelpURL=\\cern.ch\dfs\Applications\Altium\Datasheets\R0402_Phycomp_RC0402.pdf, LatestRevisionDate=17.10.2012, Manufacturer Part Number=R0402_3K3_1%_0.0625W_100PPM, Mounted=Yes, Part Description="General Purpose Thick Film Chip Resistor", Part Number=R0402_3K3_1%_0.0625W_100PPM, Pin Count=2, PressFit=No, Sense=No, SMD=Yes, Socket=No, Status="Not Recommended", TC=±100ppm/°C
R2 R3 R4 R6 R7 R8 R9 R12 R13 R15 R16 R17 R18: library part R0402_10K_1%_0.0625W_100PPM, "Resistor - 1%", Case=0402, Manufacturer=GENERIC, Manufacturer1 ComponentHeight=0.4mm, Manufacturer1 Example="YAGEO PHYCOMP", Manufacturer1 Part Number=232270671003L, Power=0.0625W, Tolerance=±1%, Author="CERN DEM JLC", Component Type=Standard, HelpURL=\\cern.ch\dfs\Applications\Altium\Datasheets\R0402_Phycomp_RC0402.pdf, Manufacturer Part Number=R0402_10K_1%_0.0625W_100PPM, Mounted=Yes, Part Description="General Purpose Thick Film Chip Resistor", Part Number=R0402_10K_1%_0.0625W_100PPM, Pin Count=2, PressFit=No, Sense=No, SMD=Yes, Socket=No, Status="Not Recommended", TC=±100ppm/°C
  R2: CreateDate=03.12.2007, LatestRevisionDate=17.10.2012
  R3 R4 R6 R7 R8 R9 R12 R13 R15 R16 R17 R18: CreateDate=12/3/2007, LatestRevisionDate=10/17/2012
R5 R10 R14 R19: library part R0402_499R_1%_0.1W_100PPM, "Resistor - 1%", Case=0402, Manufacturer=GENERIC, Manufacturer1 ComponentHeight=0.4mm, Manufacturer1 Example=PANASONIC, Manufacturer1 Part Number=ERJ2RKF4990X, Power=0.1W, Tolerance=±1%, Voltage=50V, Author="CERN DEM MR", Component Type=Standard, CreateDate=11/22/2016, HelpURL=\\cern.ch\dfs\Applications\Altium\Datasheets\R0402_PANASONIC_ERJ2RK.pdf, LatestRevisionDate=11/22/2016, Manufacturer Part Number=R0402_499R_1%_0.1W_100PPM, Mounted=Yes, Part Description="General Purpose Thick Film Chip Resistor", Part Number=R0402_499R_1%_0.1W_100PPM, Pin Count=2, PressFit=No, Sense=No, SMD=Yes, Socket=No, Status="Not Recommended", TC=±100ppm/°C
R11: library part R0402_22R_1%_0.0625W_100PPM, "Resistor - 1%", Case=0402, Manufacturer=GENERIC, Manufacturer1 ComponentHeight=0.4mm, Manufacturer1 Example="YAGEO PHYCOMP", Manufacturer1 Part Number=232270672209L, Power=0.0625W, Tolerance=±1%, Author="CERN DEM JLC", Component Type=Standard, CreateDate=12/3/2007, HelpURL=\\cern.ch\dfs\Applications\Altium\Datasheets\R0402_Phycomp_RC0402.pdf, LatestRevisionDate=10/17/2012, Manufacturer Part Number=R0402_22R_1%_0.0625W_100PPM, Mounted=Yes, Part Description="General Purpose Thick Film Chip Resistor", Part Number=R0402_22R_1%_0.0625W_100PPM, Pin Count=2, PressFit=No, Sense=No, SMD=Yes, Socket=No, Status="Not Recommended", TC=±100ppm/°C
SW2: library part SW_OMRON_A6H-4102, "4 Ways SPST DIP Switch", Manufacturer=OMRON, Manufacturer Part Number=A6H-4102, Author="CERN DEM JLC", Component Type=Standard, ComponentHeight=1.45mm, CreateDate=17.12.2013, Family=Switch, HelpURL=\\cern.ch\dfs\Applications\Altium\Datasheets\SW_OMRON_A6H-4102.pdf, LatestRevisionDate=17.12.2013, Mounted=Yes, PackageDescription="Pitch 1.27mm, Body 6.31 x 4.5mm, 4 Ways SPST Surface-Mounting DIP Switch, OMRON A6H", Part Description="4 Ways Ultra-low Profile, Half-pitch, SPST DIP Switch with Seal Tape, Rating 25mA 24VDC", Part Number=SW_OMRON_A6H-4102, Pin Count=8, PressFit=No, Sense=No, SMD=Yes, Socket=No, Status=None

## Via types
v1: diameter 0.5, hole 0.2, L1 to L4, tented both sides, 168 vias

## Nets (pads, with @x,y where several pads share a name; then routed paths per layer and width w, separated by ;. In a path a pad name is that pad's centre, name@x,y a point inside that pad or via, vN(x,y) a via of type N, cw(c..) or ccw(c..) an arc to the next point about the centre after c; other vN are vias at no path point)
AIN0: C10.2 C11.2 IC3.4 R5.2 | length 7.1
  L4 w0.3: IC3.4 15,32 16.4,30.6 16.4,29.6 16.4,28.75 C11.2 16.5,28.55 R5.2 ; C11.2@16.4,28.65 C10.2
AIN1: C11.1 C12.1 IC3.5 R10.2 | length 5.6
  L4 w0.3: IC3.5 14,30.7 15.027,29.673 15.45,29.25 C11.1 15.3,28.55 R10.2 ; C12.1 C11.1@15.4,28.65
AIN2: C13.2 C14.2 IC3.6 R14.2 | length 5.9
  L4 w0.3: C14.2@8.6,28.65 C13.2 ; R14.2 8.7,28.55 C14.2 8.55,31.2 8.85,31.5 IC3.6
AIN3: C14.1 C15.1 IC3.7 R19.2 | length 7
  L4 w0.3: C15.1 C14.1@7.6,28.65 ; R19.2 7.5,28.55 C14.1 7.65,29.15 8,29.5 8,31.4 8.6,32 IC3.7
CS_ID0: IC1.5 R26.2 SW2.4 | length 14.6
  L1 w0.15: SW2.4 13.295,59.895 13.575,60.175 v1(14.295,60.175)
  L3 w0.15: v1(11.34,58.157) 11.783,58.6 12.29,58.6 13.467,59.777 13.893,59.777 14.291,60.175 v1(14.295,60.175)
  L4 w0.15: IC1.5 10.54,52.244 10.417,52.367 10.417,52.475 9.7,53.192 9.7,56.517 v1(11.34,58.157) ; v1(14.295,60.175) 14.295,60.865 R26.2
CS_ID1: IC1.4 R27.2 SW2.3 | length 13.7
  L1 w0.15: SW2.3 12.025,59.931 v1(12.394,60.3)
  L4 w0.15: IC1.4 10.14,52.36 9.4,53.1 9.4,56.761 9.939,57.3 10.5,57.861 10.5,58.1 11.751,59.351 11.751,60.813 11.958,61.02 R27.2 12.394,60.921 v1(12.394,60.3)
CS_ID2: IC1.3 R32.2 SW2.2 | length 12.8
  L1 w0.15: SW2.2 10.755,60.033 v1(11.022,60.3)
  L4 w0.15: IC1.3 9.74,52.16 9.1,52.8 9.1,58.3 10.432,59.632 10.432,60.532 10.92,61.02 R32.2 11.022,60.937 v1(11.022,60.3)
CS_ID3: IC1.2 R33.2 SW2.1 | length 12.5
  L1 w0.15: SW2.1 9.485,59.925 v1(9.86,60.3)
  L4 w0.15: IC1.2 9.34,52.06 8.8,52.6 8.8,59.3 9.264,59.764 9.264,60.87 R33.2 9.564,60.869 9.564,60.596 v1(9.86,60.3)
GND: C1.1 C2.1 C3.1 C4.1 C5.1 C6.1 C7.1 C8.1 C9.1 C10.1 C12.2 C13.1 C15.2 C16.1 C231.1 C232.1 IC1.65 IC2.2 IC3.3 IC7.2 J1.2 J1.10 J4.1 J4.5 J4.9 J9.1 J9.5 J9.9 J10.7 J10.11 J11.7 J11.11 LD1.1 LD26.1 LD27.1 LD28.1 MP1.1 MP2.1 NT1.2 NT2.2 NT3.2 NT4.2 NT5.2 NT6.2 NT7.2 NT8.2 NT9.2 NT10.2 NT11.2 NT12.2 P1.3 P2.3 R6.1 R7.2 R15.1 R16.2 SW2.5 SW2.6 SW2.7 SW2.8 | length 58.5
  L1 w0.15: J9.9 J9.9@5.5,51.8 ; v1(6.585,51.15) 6.546,51.19 6.11,51.19 J9.9@5.5,51.8 ; v1(7.167,52.274) 7.104,52.338 6.038,52.338 J9.9@5.5,51.8 ; LD27.1 v1(7.7,56.1) ; SW2.8 SW2.5
  L1 w0.152: J1.10 9.86,71.247 10.4,71.787 v1(10.4,71.8) ; J1.2 11.13,69.79 11.409,69.511 11.409,69.407 v1(11.476,69.34)
  L1 w0.3: v1(6.585,51.15) 17.35,51.15 17.732,51.532 19.732,51.532 J4.9
  L1 w0.5: C1.1 v1(10.253,47.947) ; v1(12.901,47.8) C3.1
  L4 w0.15: J9.5 5.5,47.8 6.133,48.433 6.427,48.433 v1(6.494,48.5) ; v1(10.888,54.224) 10.888,53.702 C4.1 ; v1(11.5,39.4) C232.1 ; C5.1 v1(11.94,54.224) ; v1(12.6,39.4) C2.1 ; v1(17.623,47.6) 19.8,47.6 J4.5 ; v1(17.9,43.05) C6.1
  L4 w0.152: v1(6.439,63.076) 6.373,63.009 6.209,63.009 5.5,62.3 J10.11 4.424,61.876 6.412,61.876 6.538,61.75 v1(6.632,61.75) ; v1(8.252,53.463) v1@8.318,53.396 ; v1(17.626,63.191) 17.626,63.174 18.5,62.3 J11.11 19.576,61.876 17.882,61.876 17.726,61.72 v1(17.632,61.72)
  L4 w0.3: v1(5.63,26.77) R16.2 ; v1(5.63,27.75) C15.2 ; R15.1 v1(10.47,26.77) ; C13.1 v1(10.47,27.75) ; v1(13.53,26.77) R7.2 ; v1(13.53,27.75) C12.2 ; IC3.3 v1(15.2,32.5) ; R6.1 v1(18.27,26.77) ; C10.1 v1(18.27,27.75)
  L4 w0.5: J10.7@3.3,70.3 v1(3.3,72) ; J10.7@4.7,70.3 v1(4.7,72) ; J11.7@19.3,70.3 v1(19.3,72) ; J11.7@20.7,70.3 v1(20.7,72)
  other v1: 1,2 6,2 11,2 16,2 21,2 1,10 6,10 11,10 16,10 21,10 1,19 23,19 6.4,24.7 17.7,24.7 9.8,24.8 14.2,24.8 1,29 23,29 17.4,30.1 7.1,30.3 9.3,30.3 11.8,32.5 22,33 5.7,33.5 2.8,33.8 8,34.6 4.3,35.1 8.2,35.7 0.7,36.6 12.9,37.3 20.9,38.1 21.5,38.1 3,39.9 4.6,40.1 2.4,40.3 0.8,42.2 9.702,44.599 12.044,44.599 14.227,44.7 13.375,45.6 10.92,45.73 9.568,49.376 12.044,49.376 14.33,49.376 21.4,58.9 11.3,62.8 8.7,65.2
HSPI_AD0: IC1.22 J4.8 J9.8 | length 23.9
  L1 w0.15: J9.8 6.4,53.8 8,52.2 16,52.2 17.6,53.8 J4.8
  L3 w0.15: v1(17.1,53.3) 16.8,53 16.8,48.409 17.155,48.054 v1(17.155,48.018)
  L4 w0.15: IC1.22 16.149,48.009 17.146,48.009 v1(17.155,48.018)
HSPI_AD1: IC1.18 J4.10 J9.10 | length 19.5
  L1 w0.152: J9.10 5.5,49.8 6.377,50.677 v1(18.076,50.677) ; v1@18.075,50.65 18.076,50.649 18.076,50.224 18.5,49.8 J4.10
  L4 w0.152: IC1.18 16.998,49.6 17.17,49.772 17.17,49.988 17.435,50.253 17.651,50.253 v1@18.075,50.677
HSPI_AD2: IC1.28 J4.12 J9.12 | length 18.1
  L1 w0.152: J9.12 4.07,45.73 6.163,45.73 6.346,45.547 7.447,45.547 7.794,45.2 12.4,45.2 12.6,45 13.7,45 14.1,45.4 v1(17.5,45.4) 17.83,45.73 19.93,45.73 J4.12
  L4 w0.152: IC1.28 17,45.6 17.164,45.436 17.464,45.436 v1(17.5,45.4)
HSPI_AD3: IC1.21 J4.3 J9.3 | length 23
  L1 w0.152: v1(6.377,51.755) 16.655,51.755 17.085,52.185 v1(17.6,52.7)
  L3 w0.15: v1(17.6,52.7) 17.6,52.3 17.1,51.8 17.1,48.958 v1(17.625,48.433)
  L4 w0.15: v1(17.6,52.7) 17.62,52.7 17.883,52.437 17.883,52.417 18.5,51.8 J4.3
  L4 w0.152: J9.3 4.045,51.755 v1(6.377,51.755) ; IC1.21 16.164,48.424 16.92,48.424 16.967,48.471 17.587,48.471 v1(17.625,48.433)
HSPI_CLK: IC1.7 J4.4 J9.4 | length 16.5
  L1 w0.152: v1(6.494,49.8) 6.517,49.8 6.844,50.127 v1(11.334,50.127) 14.22,50.127 15.224,49.123 v1(17.6,49.123)
  L4 w0.152: J9.4 v1(6.494,49.8) ; v1(11.334,50.127) 11.337,50.13 11.337,51.197 IC1.7 ; v1(17.6,49.123) 17.667,49.19 17.89,49.19 18.5,49.8 J4.4@18.624,49.8
HSPI_CS0: IC1.25 J4.6 J9.6 | length 18.6
  L1 w0.152: v1(6.6,46.8) 6.627,46.773 7.93,46.773 8.404,46.3 17.037,46.3 17.17,46.167 17.333,46.167 v1(17.4,46.1)
  L4 w0.152: J9.6 5.5,45.8 6.433,46.733 6.533,46.733 v1(6.6,46.8) ; IC1.25 16.164,46.776 17.024,46.776 17.364,46.436 17.364,46.261 17.393,46.232 v1@17.4,46.232 ; v1@17.437,46.232 v1@17.4,46.232 ; J4.6 18.5,45.8 18.2,46.1 v1(17.4,46.1) v1@17.4,46.232
HSPI_ID: IC1.64 J4.2 J9.2 | length 21.5
  L1 w0.152: v1(7.4,53.5) 8.2,52.7 16,52.7 16.5,53.2 16.5,53.4 v1(17.5,54.4)
  L4 w0.152: J9.2 4.424,54.224 6.676,54.224 v1(7.4,53.5) 7.4,52.9 7.759,52.541 7.759,50.024 7.74,50.005 IC1.64 ; v1(17.5,54.4) 17.594,54.4 17.77,54.224 19.576,54.224 J4.2
HSPI_Q: IC1.24 J4.11 J9.11 | length 19.5
  L1 w0.152: J9.11 7.295,47.8 8.295,48.8 10,48.8 10.3,49.1 11.2,49.1 11.447,48.853 13.715,48.853 13.968,48.6 15.4,48.6 17.1,46.9 v1(17.6,46.9) 17.667,46.967 17.837,46.967 18.076,47.206 18.076,47.376 18.5,47.8 J4.11
  L4 w0.152: IC1.24 17.349,47.2 17.6,46.949 v1(17.6,46.9)
HSPI_sAD0: IC1.31 J10.10 J11.10 | length 39.4
  L1 w0.15: v1(6.632,64.545) 6.699,64.478 6.922,64.478 7.3,64.1 9.577,64.1 10,64.523 14.134,64.523 14.311,64.7 15.1,64.7 15.4,64.4 17.1,64.4 v1(17.5,64.8)
  L3 w0.15: v1(17.26,44.325) 16.5,45.085 16.5,52.774 16.508,52.782 16.508,53.968 17.048,54.507 17.048,60.009 17.223,60.184 17.223,61.489 17.171,61.541 17.171,64.471 v1(17.5,64.8)
  L4 w0.15: J10.10 4.245,64.545 v1(6.632,64.545) ; IC1.31 16.151,44.389 17.196,44.389 v1(17.26,44.325) ; v1(17.5,64.8) 18,64.8 18.5,64.3 J11.10
HSPI_sAD1: IC1.32 J10.12 J11.12 | length 36.8
  L1 w0.15: v1(6.3,61.1) 7,61.1 7.6,61.7 16.021,61.7 v1(16.621,61.1)
  L3 w0.152: v1(16.621,61.1) 16.621,54.635 16.23,54.244 16.23,52.898 16.2,52.867 16.2,44.635 v1(17.26,43.575)
  L4 w0.15: J10.12 5.5,60.3 v1(6.3,61.1) ; v1(16.621,61.1) 16.688,61.033 17.767,61.033 18.5,60.3 J11.12
  L4 w0.152: v1(6.3,61.1) 6.394,61.1 v1@6.494,61 ; IC1.32 16.79,44 17.215,43.575 v1(17.26,43.575)
IN1_N: P2.2 R17.2 | length 7.7
  L4 w0.3: P2.2 8.2,18.05 8.2,20.2 7.5,20.9 R17.2
IN1_P: P2.1 R12.2 | length 6.9
  L4 w0.3: R12.2 8.7,21.3 9,21 8.95,20.95 P2.1
IN2_N: P1.2 R8.2 | length 7.7
  L4 w0.3: R8.2 15.3,20.5 17.55,18.25 P1.2
IN2_P: P1.1 R3.2 | length 8.2
  L4 w0.3: R3.2 16.5,20.9 18.5,18.9 18.5,17.85 P1.1
IO0: IC1.34
IO1: IC1.35
IO2: IC1.36
IO3: IC1.37
IO4: IC1.38
IO5: IC1.40
IO6: IC1.42
IO7: IC1.43
MODBUS_A: J10.4 J11.4 | length 16.8
  L1 w0.152: J10.4 6.236,64.3 7.195,63.341 16.482,63.341 17.467,64.326 19.974,64.326 J11.4
MODBUS_B: J10.6 J11.6 | length 16.7
  L1 w0.152: J10.6 7.2,60.3 8,61.1 15.725,61.1 16.325,60.5 17.3,60.5 17.5,60.3 J11.6
NetIC3_9: IC3.9 R11.1 | length 3.3
  L4 w0.15: IC3.9 10.7,33 11.2,33.5 R11.1
NetLD1_2: LD1.2 R1.1 | length 3.8
  L1 w0.15: LD1.2 15.062,54.075 15.8,54.813 v1(15.8,55.2)
  L4 w0.15: R1.1 14.96,56.411 15.175,56.196 15.175,56.176 15.8,55.551 v1(15.8,55.2)
NetLD18_1: LD18.1 R26.1 | length 6.3
  L1 w0.15: LD18.1 12.983,57.308 13.235,57.308 v1(13.776,57.85)
  L4 w0.15: v1(13.776,57.85) 13.776,58.276 14.873,59.373 14.873,60.558 15.003,60.688 15.003,61.435 15.003,61.51 14.511,62.002 R26.1
NetLD19_1: LD19.1 R27.1 | length 5.8
  L1 w0.15: LD19.1 11.586,57.211 11.586,57.562 v1(12.14,58.116)
  L4 w0.15: v1(12.14,58.116) 12.14,59.04 13.004,59.904 13.004,60.645 13.005,60.646 13.005,61.468 12.513,61.96 R27.1
NetLD20_1: LD20.1 R32.1 | length 6.1
  L1 w0.15: v1(9.8,58) 10.3,57.5 LD20.1
  L4 w0.15: v1(9.8,58) 9.867,58.067 9.867,58.267 11.474,59.874 11.474,61.371 11.175,61.67 11.175,61.745 10.96,61.96 R32.1
NetLD21_1: LD21.1 R33.1 | length 5.4
  L1 w0.15: v1(8.7,60.1) 8.69,60.09 8.69,57.535 LD21.1@9.18,57.045
  L4 w0.15: v1(8.7,60.1) 8.7,61.266 9.394,61.96 R33.1
NetLD26_2: LD26.2 R46.1 | length 3.3
  L1 w0.15: v1(21.3,44.4) 22.125,43.575 LD26.2
  L4 w0.15: R46.1 v1(21.3,44.4)
NetLD27_2: LD27.2 R48.1 | length 1.3
  L1 w0.15: R48.1 7.57,57.83 7.7,57.7 LD27.2
NetLD28_2: LD28.2 R2.2 | length 1.7
  L1 w0.15: v1(20.6,58) LD28.2
  L4 w0.15: R2.2 v1(20.6,58)
NetR3_1: R3.1 R4.2 | length 1
  L4 w0.3: R3.1 R4.2
NetR4_1: R4.1 R5.1 R6.2 | length 2.1
  L4 w0.3: R5.1 R4.1 17.56,25.87 R6.2
NetR7_1: R7.1 R9.1 R10.1 | length 2.2
  L4 w0.3: R7.1@14.1,25.83 14.14,25.87 R9.1 R10.1
NetR8_1: R8.1 R9.2 | length 1
  L4 w0.3: R8.1 R9.2
NetR12_1: R12.1 R13.2 | length 1
  L4 w0.3: R12.1 R13.2
NetR13_1: R13.1 R14.1 R15.2 | length 2.1
  L4 w0.3: R14.1 R13.1 9.76,25.87 R15.2
NetR16_1: R16.1 R18.1 R19.1 | length 2.2
  L4 w0.3: R16.1 6.34,25.87 R18.1 R19.1
NetR17_1: R17.1 R18.2 | length 1
  L4 w0.3: R17.1 R18.2
NetR47_1: R47.1 R48.2 | length 1
  L1 w0.15: R48.2 R47.1
P1V8: C5.2 C9.2 C232.2 IC1.8 IC1.41 IC2.5 | length 43.5
  L1 w0.6: v1(3.7,36.5) 3.65,36.55 C9.2 IC2.5 9,38.8 v1(10.9,40.7)
  L3 w0.6: v1(3.7,36.5) v1(4.3,36.5) 4.8,36.5 6,37.7 6,44 7.6,45.6 7.6,50.9 9.1,52.4 9.1,54.7 10.6,56.2 v1(11.5,56.2)
  L4 w0.152: IC1.8 11.764,51.224 11.764,52.035 11.94,52.211 C5.2
  L4 w0.2: v1(10.9,40.7) 11.173,40.7 11.213,40.74 11.29,40.74 C232.2 11.5,41.5 11.74,41.74 IC1.41
  L4 w0.3: v1(11.5,56.2) 12.2,56.2 12.7,55.7 12.7,53.3 12.31,52.91 12.1,52.91 C5.2
P3V3: C1.2 C2.2 C3.2 C4.2 C7.2 C16.2 D1.1 IC1.6 IC1.23 IC1.39 IC1.57 IC3.8 IC7.5 J1.4 LD18.2 LD19.2 LD20.2 LD21.2 R20.1 R21.1 R46.2 | length 118.7
  L1 w0.15: LD21.2 LD20.2 LD19.2 LD18.2 ; v1(10.2,53.6) 10.2,54.6 10.3,54.7 LD20.2@10.3,55.395
  L1 w0.152: v1(11.3,68.5) 11.367,68.433 11.53,68.433 11.563,68.4 12.105,68.4 J1.4
  L1 w0.5: C3.2 14.94,47.8 v1(15.14,47.6)
  L1 w0.508: C1.2 8.792,47.916 v1(8.792,47.206) 8.889,47.109 13.96,47.109 14.337,47.485 C3.2@14.337,47.744
  L1 w0.6: v1(7.85,33.17) 8.88,34.2 21.7,34.2 v1(22.2,34.7) 22.15,34.75 IC7.5
  L3 w0.15: v1(10.2,53.6) 10.2,54.7 10.48,54.98 12.28,54.98 12.9,55.6 12.9,58.4 13.8,59.3 14.2,59.3 14.747,59.847 14.747,60.778 14.43,61.095
  L3 w0.152: 14.43,61.095 v1(14.43,62.761)
  L3 w0.516: 15.098,44.198 15.14,44.24 v1(15.14,47.6)
  L3 w0.6: v1(10.2,53.6) 10.2,53.1 13.5,49.8 13.5,49.24 v1@15.098,47.642 ; 15.098,44.198 13.2,42.3 v1(13.2,40.7) 13.8,40.1 13.8,37.2 16.3,34.7 v1(22.2,34.7) v1(22.8,34.7)
  L4 w0.15: IC1.57 7.743,47.203 8.79,47.203 v1(8.792,47.206) ; IC1.6 C4.2 ; v1(15.14,47.6) IC1.23
  L4 w0.152: v1(11.3,68.5) 11.3,67.8 12,67.1 12,66.3 13.8,64.5 13.8,63.392 v1(14.43,62.761)
  L4 w0.2: R20.1 R21.1 1.85,36.35 3.9,34.3 7.124,34.3 7.85,33.574 v1(7.85,33.17) ; IC1.39 12.54,41.66 12.6,41.6 C2.2 12.81,40.74 C2.2@12.887,40.74 ; 12.927,40.7 v1(13.2,40.7) ; D1.1 20,42.3 20.33,42.63 R46.2 22.97,42.63 23.5,42.1 23.5,39.6 22.8,38.9 v1(22.8,34.7)
  L4 w0.3: v1(7.85,33.17) C16.2 IC3.8 ; v1(10.2,53.6) 10.2,53.378 10.515,53.063 10.627,53.063 C4.2
P5V0: C8.2 C231.2 IC2.1 IC2.3 IC7.1 IC7.3 J10.2 J11.2 R47.2 | length 49.1
  L1 w0.127: IC2.3 1.75,42.95 2.3,43.5 3.5,43.5 3.65,43.35 C8.2 ; IC7.3 20.25,41.15 20.8,41.7 21.9,41.7 22.15,41.45 C231.2
  L1 w0.15: R47.2 7.57,59.837 7.8,60.067 v1(7.8,60.1)
  L3 w0.6: v1(6.4,68.6) v1(6.4,68) 6.692,67.708 6.692,67.108 7.777,66.023 8.766,66.023 8.82,66.077 9.38,66.077 9.434,66.023 15.623,66.023 v1(17.6,68) v1(17.6,68.6)
  L3 w1: v1(4.3,42.2) v1(4.3,42.8) 4.3,44.6 5.3,45.6 5.3,56.2 7.777,58.677 7.777,66.023
  other v1: 22.8,39.9 18.6,40.1 22.8,40.5 18.6,40.7
P12V0: J10.1 J10.3 J11.1 J11.3 R2.1 | length 22.4
  L1 w0.5: J10.1@2.6,70.3 v1(2.6,72) ; J10.1 v1(4,72) ; J10.1@5.4,70.3 v1(5.4,72) ; J11.1@18.6,70.3 v1(18.6,72) ; J11.1 v1(20,72) ; J11.1@21.4,70.3 v1(21.4,72)
  L3 w0.15: 18.9,57.2 v1(19.6,57.2)
  L3 w0.7: v1(17.6,66.6) v1(17.6,66) 18.9,64.7 18.9,57.2
  L4 w0.15: R2.1 18.73,57.47 19,57.2 v1(19.6,57.2)
  other v1: 6.4,65.8 6.4,66.4
PROJECT_ID0: IC1.55
PROJECT_ID1: IC1.56
PROJECT_ID2: IC1.58
PROJECT_ID3: IC1.59 NT8.1 | length 1.1
  L4 w0.15: IC1.59 NT8.1
PROJECT_ID4: IC1.60 NT9.1 | length 1.1
  L4 w0.15: IC1.60 8.39,48.4 8.423,48.433 NT9.1
PROJECT_ID5: IC1.61 NT12.1 | length 1.1
  L4 w0.15: IC1.61 NT12.1
PROJECT_ID6: IC1.62 NT10.1 | length 1.1
  L4 w0.15: IC1.62 NT10.1
PROJECT_ID7: IC1.63 NT11.1 | length 1.1
  L4 w0.15: IC1.63 NT11.1
RESETn_I: IC1.33 J10.9 | length 36.9
  L1 w0.15: v1(10.4,64) 11.5,64 11.746,64.246 14.248,64.246 14.329,64.326 14.874,64.326 15.4,63.8 v1(16.2,63.8)
  L3 w0.15: v1(16.2,63.8) 16.169,63.769 16.169,56.877 16.277,56.77 16.277,54.717 15.952,54.392 15.952,53.013 15.9,52.961 15.9,44 16.657,43.243 v1(16.657,42.8)
  L4 w0.15: J10.9 5.484,66.3 5.909,65.875 5.909,65.591 6.317,65.183 7.317,65.183 8.5,64 v1(10.4,64) ; IC1.33 v1(16.657,42.8)
RESETn_O: IC1.19 J11.9 | length 20.1
  L3 w0.15: v1(15.013,50.073) 15.007,50.079 15.007,52.88 14.9,52.987 14.9,55.5 15.6,56.2 15.6,64.1 v1(16.5,65)
  L4 w0.15: v1(15.013,50.073) 15.013,49.44 15.176,49.276 15.253,49.2 IC1.19 ; v1(16.5,65) 16.503,65.003 16.855,65.003 17.4,65.548 17.748,65.548 17.787,65.548 18.075,65.836 18.075,65.875 J11.9@18.5,66.3
REV_ID0: IC1.1 NT1.1 | length 1.8
  L4 w0.127: 8.24,52.147 NT1.1
  L4 w0.152: 8.24,52.147 8.24,51.56 8.6,51.2 IC1.1
REV_ID1: IC1.10 NT2.1 | length 0.4
  L4 w0.15: NT2.1 12.528,50.223 12.528,50.488 IC1.10@12.54,50.5
REV_ID2: IC1.11 NT3.1 | length 1.1
  L4 w0.15: NT3.1 IC1.11
REV_ID3: IC1.12 NT4.1 | length 0.9
  L4 w0.15: IC1.12 13.34,50.318 NT4.1@13.388,50.27
REV_ID4: IC1.13
REV_ID5: IC1.26 NT5.1 | length 1
  L4 w0.152: NT5.1 IC1.26
REV_ID6: IC1.27 NT6.1 | length 1
  L4 w0.152: NT6.1 IC1.27
REV_ID7: IC1.30 NT7.1 | length 1
  L4 w0.152: NT7.1 IC1.30
RSTn: C6.2 D1.2 IC1.29 | length 4.5
  L4 w0.15: 17.975,44.475 18.265,44.185 C6.2 19.15,43.95 19.4,43.7 D1.2
  L4 w0.152: IC1.29 16.164,45.176 16.924,45.176 17.263,44.837 17.613,44.837 17.975,44.475
SCL: IC1.9 J10.8 J11.8 | length 37.6
  L1 w0.152: v1(10,66.7) 11.3,68 v1(12.4,68)
  L4 w0.152: J10.8 5.485,68.3 5.909,67.876 5.909,67.691 6.354,67.246 6.65,67.246 7.597,66.3 9.197,66.3 9.597,66.7 v1(10,66.7) 10,65.2 12.3,62.9 12.7,62.9 13.283,62.317 13.283,60.531 13.283,60.53 13.283,59.583 12.7,59 12.7,56.873 13.2,56.373 13.2,53.076 12.164,52.04 12.164,51.224 IC1.9 ; v1(12.4,68) 12.434,67.966 12.434,67.662 12.8,67.295 12.8,67 13.5,66.3 16.2,66.3 16.863,66.963 17.248,66.963 18.076,67.792 18.076,67.876 18.5,68.3 J11.8
SDA: IC1.20 J10.5 J11.5 | length 31.8
  L1 w0.152: J10.5 16.4,62.3 16.587,62.487 v1(17.623,62.487) ; v1@17.661,62.449 17.7,62.487 19.813,62.487 J11.5
  L3 w0.152: v1(17.623,49.8) 17.623,51.423 18.269,52.069 18.269,54.631 17.7,55.2 17.7,60.731 18.1,61.131 18.1,62.01 v1(17.623,62.487)
  L4 w0.152: IC1.20 16.999,48.8 17.093,48.894 17.093,49.27 v1(17.623,49.8)
SPI_CLK: IC1.48 IC3.1 | length 13.5
  L1 w0.152: v1(9.3,37.6) v1(11.6,37.6)
  L4 w0.15: 8,38.9 8,40.6 8.94,41.54 IC1.48
  L4 w0.152: 8,38.9 v1(9.3,37.6) ; v1(11.6,37.6) 12.7,36.5 12.7,36 14,34.7 IC3.1
SPI_CS0: IC1.50 IC3.2 | length 21.8
  L1 w0.15: v1(6.8,36.6) 13.1,36.6 v1(13.6,36.1)
  L4 w0.15: v1(6.8,36.6) 5.3,38.1 5.3,42.8 6.9,44.4 IC1.50 ; v1(13.6,36.1) 15.3,34.4 15.3,33.4
  L4 w0.152: IC3.2 14.9,33 15.3,33.4
SPI_CS1: IC1.51
SPI_CS2: IC1.52 R21.2 | length 7.5
  L4 w0.127: R21.2 3.4,41.5 3.7,41.8 3.7,43.1 4,43.4 5.3,43.4 6.6,44.7 6.6,45.1 6.7,45.2 IC1.52
SPI_CS3: IC1.53 R20.2 | length 6.9
  L4 w0.127: R20.2 3.2,42.5 3.4,42.7 3.4,43.3 3.754,43.654 5.154,43.654 6.3,44.8 6.3,45.4 6.5,45.6 IC1.53
SPI_MISO: IC1.44 R11.2 | length 7.6
  L4 w0.15: IC1.44 10.54,41.54 10,41 10,38 11.2,36.8 R11.2
SPI_MISO1: IC1.45
SPI_MISO2: IC1.46
SPI_MISO3: IC1.47
SPI_MOSI: IC1.49 IC3.10 | length 13
  L4 w0.15: IC1.49 7.715,43.975 6.975,43.975 6.2,43.2 6.2,39 9.6,35.6 IC3.10
STAT_LED: IC1.54 R1.2 | length 22.4
  L3 w0.15: v1(15.5,53.8) 15.5,52.4 15.6,52.3 v1(15.6,43.3)
  L4 w0.15: IC1.54 8.6,46 8.8,45.8 8.8,44.2 9.1,43.9 15,43.9 v1(15.6,43.3) ; R1.2 14.94,54.36 v1(15.5,53.8)
TCK: IC1.16 J1.1 | length 22.9
  L1 w0.152: J1.1 9.86,69.858 10.251,69.467 10.251,69.283 v1(10.317,69.216) ; v1(12.317,63.794) 14.367,63.794 v1(14.39,63.817)
  L4 w0.152: v1(10.317,69.216) 10.317,68.2 10.5,68.017 10.5,65.611 v1(12.317,63.794) ; v1(14.39,63.817) 15.281,62.926 15.281,58.912 14.33,57.961 14.33,53.86 14.94,53.25 IC1.16
TDI: IC1.15 J1.9 | length 24
  L1 w0.152: J1.9 11.633,71.739 11.633,71.833 v1(11.7,71.9)
  L4 w0.152: v1(11.7,71.9) 10.8,71 10.8,67.9 11.5,67.2 11.5,66.112 13.412,64.2 13.412,63.191 13.842,62.761 13.842,60.299 13.841,60.298 13.841,58.941 13.3,58.4 13.3,57.412 13.9,56.812 13.9,53.895 14.54,53.255 IC1.15
TDO: IC1.17 J1.3 | length 23.6
  L1 w0.152: v1(12.145,69.246) 12.145,69.34 12.276,69.472 12.276,69.841 J1.3
  L4 w0.152: v1(12.145,69.246) 11.8,68.901 11.8,67.8 12.4,67.2 12.4,66.6 15.7,63.3 15.7,56.4 16.4,55.7 16.4,53.2 17.593,52.007 17.593,50.881 16.814,50.102 16.814,50.024 16.79,50 IC1.17
TMS: IC1.14 J1.5 | length 29.1
  L1 w0.152: v1(11,66.9) 12.8,66.9 13.4,66.3 15.169,66.3 16.219,67.35 16.219,68.13 17.163,69.075 17.163,69.979 16.605,70.537 15.512,70.537 J1.5